# Altium PCB PMS.PcbDoc (part 3 of 3)
Units mm, origin at the board's own origin, x right, y up, seen from the top; angles counter-clockwise.
Board outline 23.9 x 83.5 mm, 4 copper layers (Top Layer, Mid Layer 1, Mid Layer 2, Bottom Layer), stack 0.77 mm thick; 91 components, 62 nets, 411 pads, 218 vias.
Unrouted connection lines stored in the file: 98.
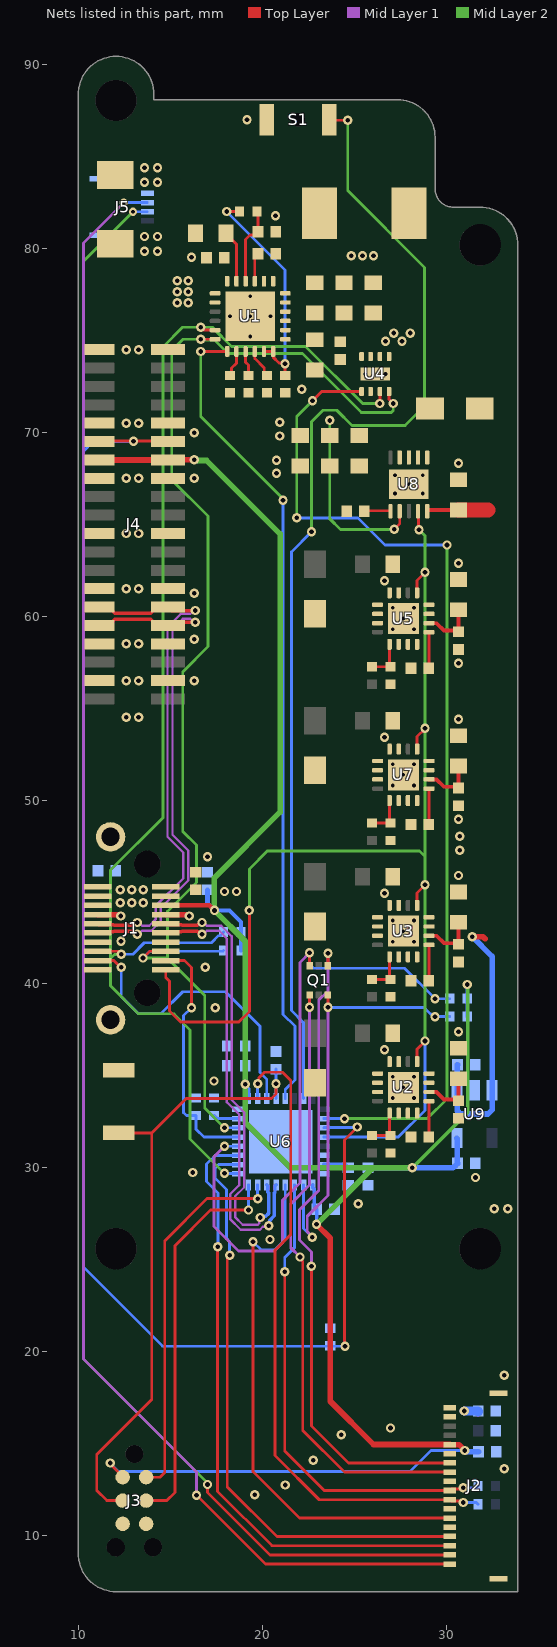
[diagram p4: the nets of this part, all layers, seen from the top]

## Via types
v1: diameter 0.508, hole 0.254, Top Layer to Bottom Layer, tented both sides, 184 vias
v2: diameter 0.381, hole 0.2, Top Layer to Bottom Layer, tented both sides, 32 vias
v3: diameter 0.45, hole 0.2, Top Layer to Bottom Layer, tented both sides, 2 vias

## Nets (pads, with @x,y where several pads share a name; then routed paths per layer and width w, separated by ;. In a path a pad name is that pad's centre, name@x,y a point inside that pad or via, vN(x,y) a via of type N, cw(c..) or ccw(c..) an arc to the next point about the centre after c; other vN are vias at no path point) (continued)
3V3_AO: C2.2 C5.2 C22.2 C23.2 C24.2 C25.2 C26.2 C43.2 J1.5 J2.14 J3.1 J4.14 R15.2 R16.2 R17.2 R18.2 U6.1 U6.15 U6.17 U9.5 | length 134.6
  Top Layer w0.152: v1(11.725,13.95) 11.725,13.905 12.413,13.217 J3.1@12.413,13.173
  Top Layer w0.254: J1.5@14.75,44.275 17.124,44.275 v1(17.4,44)
  Top Layer w0.305: J4.14@11.15,68.5 J4.14@14.875,68.5 14.88,68.505 16.297,68.505 v1(16.302,68.51) ; v1(22.95,26.925) 23.7,26.175 23.7,23.75 23.698,23.748 23.698,17.302 26.05,14.95 J2.14@30.2,14.95 30.202,14.948 30.692,14.948 v1(31.015,14.625)
  Mid Layer 2 w0.203: v1(28.168,30.005) 31.175,33.013 31.175,39.95 v1(31.15,39.975)
  Mid Layer 2 w0.305: v1(16.302,68.51) 16.341,68.471 16.979,68.471 20.975,64.475 20.975,49.35 17.4,45.775 v1(17.4,44) 19.075,42.325 v1(19.075,34.55) 19.075,32.46 21.53,30.005 26.03,30.005 ; v1(22.95,26.925) 26.03,30.005 ; v1(28.168,30.005) 26.03,30.005
  Bottom Layer w0.152: v1(11.725,13.95) 12.191,13.484 28.034,13.484 29.175,14.625 v1(31.015,14.625)
  Bottom Layer w0.203: v1(17.4,44) 18.225,44 18.85,43.375 R16.2@18.85,42.825 R15.2@18.85,41.825 ; C22.2@19.07,36.625 C23.2@19.07,35.55 19.073,35.547 19.073,34.552 v1(19.075,34.55) 19.075,34.468 19.25,34.293 U6.1@19.25,33.775 ; U6.17@22.75,29.075 22.75,28.925 22.835,28.84 22.835,27.885 C24.2@22.97,27.75 22.96,27.74 22.96,26.935 v1(22.95,26.925) ; U6.15@23.35,30.175 24.505,30.175 C26.2@24.675,30.005 C25.2@25.75,30.005 ; R18.2@31.15,38.225 R17.2@31.15,39.2 v1(31.15,39.975)
  Bottom Layer w0.254: C2.2@17.025,45.12 17.025,44.376 v1(17.4,44)
  Bottom Layer w0.305: C25.2@25.75,30.005 v1(28.168,30.005) 30.375,30.005 30.462,30.092 30.482,30.092 30.62,30.23 C43.2@30.62,30.25 30.612,30.258 30.612,31.578 U9.5@30.585,31.605 ; v1(31.015,14.625) 31.09,14.55 C5.2@31.76,14.55
5V0: C1.2 C3.2 C38.2 C39.2 C40.2 J1.1 J1.3 J2.17 J2.18 U8.3 U8.4 U8.7 | length 11
  Top Layer w0.152: v1(27.175,64.725) 27.475,65.025 U8.7@27.475,65.712
  Mid Layer 2 w0.152: v1(23.675,70.65) 23.675,65.3 24.25,64.725 v1(27.175,64.725)
  Bottom Layer w0.508: v1(30.99,16.775) 31.735,16.775 31.76,16.75 C3.2@31.735,16.725
  other v1: 32.625,27.775 33.35,27.775 17.95,45.025 18.6,45.025 30.75,47.275 30.75,48.025 20.95,69.8 20.95,70.55
BOOT0: R14.2 U6.31 | length 1.3
  Bottom Layer w0.152: R14.2@17.375,32.85 17.4,32.85 17.575,32.675 U6.31@18.65,32.675
BQ_BTST: C14.1 U1.21 | length 1.6
  Top Layer w0.152: U1.21@19.596,78.225 19.596,79.542 C14.1@19.767,79.712
BQ_INT: U1.7 U6.5 | length 44.4
  Top Layer w0.152: v1(16.651,74.4) U1.7@18.096,74.4
  Mid Layer 2 w0.152: v1(16.651,74.4) 16.651,70.875 21.133,66.392 v1(21.133,66.317)
  Bottom Layer w0.152: v1(21.133,66.317) 21.133,38.349 21.775,37.707 21.775,34.775 21.25,34.25 U6.5@21.25,33.775
BQ_PMID: C16.1 U1.23 | length 2.8
  Top Layer w0.152: C16.1@18.025,80.8 18.596,80.229 U1.23@18.596,78.225
BQ_REGN: C17.1 R1.2 U1.22 | length 4.2
  Top Layer w0.152: U1.22@19.096,78.225 19.096,80.496 19.337,80.737 19.592,80.737 C17.1@19.767,80.912 19.767,81.967 R1.2@19.721,82.012
BQ_SW: C14.2 L1.1 U1.19 U1.20
BQ_TS: R1.1 R2.1 U1.11 U1.12 | length 12.6
  Top Layer w0.152: v1(18.062,82.012) R1.1@18.771,82.012 ; U1.11@20.096,74.4 U1.12@20.596,74.4 20.596,74.087 20.908,73.775 21.198,73.775 v1(21.242,73.731) 21.245,73.728 R2.1@21.245,73.088 ; R2.1@21.22,73.088 R2.1@21.222,73.087
  Bottom Layer w0.152: v1(18.062,82.012) 21.242,78.832 v1(21.242,73.731)
CABLE_DET: J1.18 U6.3 | length 16.3
  Top Layer w0.152: J1.18@11.05,41.275 11.927,41.275 12.298,40.904 v1(12.335,40.904)
  Bottom Layer w0.152: v1(12.335,40.904) 12.335,39.326 13.286,38.375 14.475,38.375 15.675,39.575 18,39.575 19.875,37.7 19.875,35.188 20.25,34.813 U6.3@20.25,33.775
DEBUG_N: J1.17 R13.2 U6.29 | length 13.5
  Top Layer w0.152: J1.17@14.75,41.275 15.775,41.275 16.15,40.9 v1(16.15,38.7)
  Bottom Layer w0.152: v1(16.15,38.7) 15.725,38.275 15.725,33 15.875,32.85 R13.2@16.4,32.85 16.4,32.1 16.825,31.675 U6.29@18.65,31.675
FB_1V0: R12.1 R21.2 U7.5 | length 2.2
  Top Layer w0.152: R12.1@25.975,48.75 R21.2@26.975,48.75 26.925,48.8 U7.5@26.925,49.975
FB_1V8: R8.1 R9.2 U3.5 | length 2.2
  Top Layer w0.152: R8.1@25.975,40.25 R9.2@26.975,40.25 26.925,40.3 U3.5@26.925,41.475
FB_1V15: R10.1 R11.2 U5.5 | length 2.2
  Top Layer w0.152: R10.1@25.975,57.25 R11.2@26.975,57.25 26.925,57.3 U5.5@26.925,58.475
FB_3V3: R3.1 R4.2 U2.5 | length 2.2
  Top Layer w0.152: R3.1@25.975,31.75 R4.2@26.975,31.75 26.925,31.8 U2.5@26.925,32.975
GND: B-.1 C1.1 C2.1 C3.1 C4.1 C5.1 C6.1 C7.1 C8.1 C9.1 C10.1 C11.1 C12.1 C13.1 C15.1 C16.2 C17.2 C18.1 C19.1 C20.1 C21.1 C22.1 C23.1 C24.1 C25.1 C26.1 C27.1 C28.1 C29.1 C30.1 C31.1 C32.1 C33.1 C34.1 C35.1 C36.1 C37.1 C38.1 C39.1 C40.1 C41.1 C42.1 C43.1 C44.1 J1.7 J1.8 J1.13 J1.14 J1.SHIELD J2.5 J2.7 J2.10 J2.13 J2.SHIELD J3.5 J4.2 J4.4 J4.7 J4.10 J4.13 J4.16 J4.20 J5.4 J5.SHIELD R2.2 R4.1 R5.1 R6.1 R7.1 R9.1 R11.1 R13.1 R14.1 R21.1 R22.2 S1.1 S2.2 U1.2 U1.17 U1.18 U1.25 U2.6 U2.7 U2.8 U2.15 U2.16 U2.17 U3.6 U3.7 U3.8 U3.15 U3.16 U3.17 U4.1 U4.4 U4.6 U4.9 U5.6 U5.7 U5.8 U5.15 U5.16 U5.17 U6.14 U6.16 U6.32 U6.33 U7.6 U7.7 U7.8 U7.15 U7.16 U7.17 U8.11 U9.2 | length 2.6
  Top Layer w0.3: J1.8@11.05,43.775 12.222,43.775 v1(12.301,43.696) ; J1.7@14.75,43.775 15.894,43.775 15.969,43.7 v1(16.025,43.7)
  other v1: 19.6,12.225 21.25,12.75 33.165,13.625 22.775,14.1 24.3,15.475 26.975,15.85 33.165,18.725 20.425,26.1 25.225,28.05 31.6,29.475 16.225,29.75 17.375,34.725 26.65,36.425 30.675,37.4 17.45,38.7 16.9,40.9 12.318,42.327 26.65,44.925 30.675,45.9 17.025,46.925 30.675,48.95 26.65,53.425 30.675,54.4 12.6,54.5 13.275,54.5 12.6,56.5 13.275,56.5 16.3,56.5 30.675,57.45 12.6,58.5 13.275,58.5 16.3,58.75 16.3,61.25 12.6,61.5 13.275,61.5 26.65,61.925 30.675,62.875 12.6,64.5 13.275,64.5 12.6,67.5 13.275,67.5 16.3,67.5 20.775,67.775 30.675,68.325 20.775,68.475 16.3,69.975 12.6,70.5 13.275,70.5 22.15,72.35 12.6,74.5 13.275,74.5 16.15,79.525 24.85,79.6 25.45,79.6 26.05,79.6 20.725,81.775 13.6,83.6 14.3,83.6 13.6,84.4 14.3,84.4 19.175,87
  other v2: 27.095,33.795 28.255,33.795 27.675,34.375 27.095,34.955 28.255,34.955 27.095,42.295 28.255,42.295 27.675,42.875 27.095,43.455 28.255,43.455 27.095,50.795 28.255,50.795 27.675,51.375 27.095,51.955 28.255,51.955 27.095,59.295 28.255,59.295 27.675,59.875 27.095,60.455 28.255,60.455 27.225,66.675 28.725,66.675 27.975,67.175 27.225,67.675 28.725,67.675 25.6,73.175 26.7,73.175 19.346,75.212 18.246,76.312 19.346,76.312 20.446,76.312 19.346,77.412
L: J2.2 J5.2 | length 88.9
  Top Layer w0.152: v1(17.025,12.775) 17.025,12.35 20.425,8.95 J2.2@30.2,8.95
  Mid Layer 2 w0.152: v3(12.975,82) 10.28,79.305 10.28,19.595 17.025,12.85 v1(17.025,12.775)
  Bottom Layer w0.152: v3(12.975,82) J5.2@13.75,82
LA: J2.1 J5.3 | length 90.4
  Top Layer w0.152: v1(16.425,12.2) 20.175,8.45 J2.1@30.2,8.45
  Mid Layer 1 w0.152: v3@12.514,82.539 10.28,80.305 10.28,19.595 16.425,13.45 v1(16.425,12.2)
  Bottom Layer w0.152: v3(12.475,82.5) J5.3@13.75,82.5
LED_DATA: J2.6 U6.20 | length 29.4
  Top Layer w0.152: v1(19.5,25.975) 19.5,13.475 22.025,10.95 J2.6@30.2,10.95
  Bottom Layer w0.152: v1(19.5,25.975) 19.95,25.525 20.675,25.525 21.25,26.1 U6.20@21.25,29.075
MAX_INT: U4.5 U6.10 | length 55.7
  Top Layer w0.152: v1(22.734,71.72) 23.239,72.225 U4.5@25.4,72.225
  Mid Layer 2 w0.152: v1(21.875,65.35) 21.875,70.861 v1(22.734,71.72) ; v1(24.475,32.675) 28.975,32.675 30.05,33.75 v1(30.05,63.875)
  Bottom Layer w0.152: v1(21.875,65.35) 25.2,65.35 26.675,63.875 v1(30.05,63.875) ; U6.10@23.35,32.675 v1(24.475,32.675)
MCU_DATA_N: J1.11 U6.21 | length 24.2
  Top Layer w0.189: J1.11@14.75,42.775 14.806,42.831 15.606,42.831 15.643,42.867 16.479,42.867 16.639,42.708 v1(16.725,42.708)
  Mid Layer 1 w0.127: v1(16.725,42.708) 16.808,42.708 16.99,42.889 17.095,42.889 17.661,42.889 18.075,42.475 18.075,33.575 18.75,32.9 18.75,29.059 18.253,28.563 18.253,27.212 18.833,26.633 19.874,26.633 20.033,26.792 20.29,26.792 v1(20.349,26.851)
  Bottom Layer w0.189: v1(20.349,26.851) 20.41,26.912 20.41,27.138 20.658,27.386 20.658,28.632 20.694,28.669 20.694,29.019 U6.21@20.75,29.075
MCU_DATA_P: J1.9 U6.22 | length 23.8
  Top Layer w0.189: J1.9@14.75,43.275 14.806,43.219 15.606,43.219 15.643,43.183 16.479,43.183 16.639,43.343 v1(16.725,43.343)
  Mid Layer 1 w0.127: v1(16.725,43.343) 16.808,43.343 16.99,43.161 17.208,43.161 17.773,43.161 18.347,42.588 18.347,33.688 19.022,33.013 19.022,28.947 18.525,28.45 18.525,27.325 18.945,26.905 19.761,26.905 19.841,26.984 19.841,27.241 v1(19.9,27.3)
  Bottom Layer w0.189: v1(19.9,27.3) 19.961,27.361 20.187,27.361 20.342,27.516 20.342,28.632 20.306,28.669 20.306,29.019 U6.22@20.25,29.075
NetR5_2: R5.2 U1.8 | length 1.4
  Top Layer w0.152: R5.2@18.246,73.112 18.336,73.201 18.336,73.501 18.596,73.762 U1.8@18.596,74.4
NetR6_2: R6.2 U1.9 | length 1.3
  Top Layer w0.152: U1.9@19.096,74.4 19.096,73.812 19.246,73.662 R6.2@19.246,73.112
NetR7_2: R7.2 U1.10 | length 1.6
  Top Layer w0.152: U1.10@19.596,74.4 19.596,74.012 20.107,73.501 20.107,73.251 R7.2@20.247,73.112
PMS_SCL: J1.16 R16.1 U1.5 U4.7 U6.25 | length 74.1
  Top Layer w0.152: J1.16@11.05,41.775 12.172,41.775 v1(12.335,41.612) ; v1(16.656,75.719) 16.813,75.562 U1.5@17.434,75.562 ; v1(26.4,71.57) U4.7@26.4,72.225
  Mid Layer 2 w0.152: v1(12.335,41.612) 12.32,41.597 11.972,41.597 11.75,41.375 ; v1(17.95,29.7) 16.075,31.575 16.075,37.5 15.2,38.375 13.275,38.375 11.75,39.9 11.75,41.375 ; v1(26.4,71.57) 25.467,71.57 22.362,74.675 18.325,74.675 17.281,75.719 v1(16.656,75.719) 15.669,75.719 14.6,74.65 14.6,49.043 11.75,46.193 11.75,41.375
  Bottom Layer w0.152: v1(12.335,41.612) 12.956,41.612 13.582,42.239 17.232,42.239 17.619,42.626 17.726,42.626 17.9,42.8 R16.1@17.9,42.825 ; v1(17.95,29.7) 17.962,29.688 18.637,29.688 U6.25@18.65,29.675
PMS_SDA: J1.15 R15.1 U1.6 U4.8 U6.30 | length 69.8
  Top Layer w0.152: v1(13.515,41.412) 13.878,41.775 J1.15@14.75,41.775 ; v1(16.649,75.062) U1.6@17.434,75.062 ; U4.8@26.9,72.225 26.9,71.8 v1(27.13,71.57)
  Mid Layer 2 w0.152: v1(13.515,41.412) 14.85,41.412 ; v1(17.95,32.175) 16.875,33.25 16.875,39.375 14.85,41.4 14.85,41.412 ; v1(27.13,71.57) 27.128,71.568 27.128,71.195 27.016,71.083 25.39,71.083 22.18,74.293 18.147,74.293 17.435,75.005 16.706,75.005 v1(16.649,75.062) 15.687,75.062 15.075,74.45 15.075,67.425 17.05,65.45 17.05,58.35 15.675,56.975 15.675,48.3 16.425,47.55 16.425,45.525 14.85,43.95 14.85,41.412
  Bottom Layer w0.152: v1(13.515,41.412) 13.878,41.775 17.85,41.775 R15.1@17.9,41.825 ; v1(17.95,32.175) U6.30@18.65,32.175
PWR_BTN_N: S1.2 U6.7 | length 63
  Top Layer w0.152: S1.2@23.65,87 23.675,86.975 v1(24.65,86.975)
  Mid Layer 2 w0.152: v1(22.678,64.594) 22.678,70.578 23.3,71.2 24.05,71.2 24.875,70.375 27.775,70.375 28.825,71.425 28.825,78.975 24.65,83.15 v1(24.65,86.975)
  Bottom Layer w0.152: U6.7@22.25,33.775 22.25,37.89 21.586,38.554 21.586,63.502 v1(22.678,64.594)
PWR_ON: J1.19 U2.13 U3.13 U5.13 U6.12 U7.13 U8.9 | length 69
  Top Layer w0.152: J1.19@14.75,40.775 14.75,40.346 14.95,40.146 14.95,38.525 15.55,37.925 18.725,37.925 19.3,38.5 v1(19.3,44) ; U2.13@28.425,35.775 28.425,36.45 28.85,36.875 v1(28.85,36.9) ; U3.13@28.425,44.275 28.425,44.95 28.85,45.375 v1(28.85,45.4) ; U7.13@28.425,52.775 28.425,53.45 28.85,53.875 v1(28.85,53.9) ; U5.13@28.425,61.275 28.425,61.95 28.85,62.375 v1(28.85,62.4) ; U8.9@28.475,65.712 28.5,65.688 28.5,64.725 v1(28.525,64.7)
  Mid Layer 2 w0.152: v1(19.3,44) 19.3,46.25 20.275,47.225 28.55,47.225 28.85,46.925 ; v1(28.525,64.7) 28.85,64.375 v1(28.85,62.4) v1(28.85,53.9) 28.85,46.925 ; v1(28.85,36.9) v1(28.85,45.4) 28.85,46.925
  Bottom Layer w0.152: U6.12@23.35,31.675 27.4,31.675 28.85,33.125 v1(28.85,36.9)
RESET_N: C36.2 J3.3 S2.1 U6.4 | length 33.9
  Top Layer w0.152: S2.1@12.2,31.9 13.99,31.9 ; J3.3@12.413,11.903 11.547,11.903 11,12.45 11,14.4 13.99,17.39 13.99,31.9 ; v1(20.75,34.575) 20.75,34.025 20.5,33.775 15.865,33.775 13.99,31.9
  Bottom Layer w0.152: U6.4@20.75,33.775 v1(20.75,34.575) C36.2@20.75,35.37
SS_1V0: C35.2 U7.9 | length 2
  Top Layer w0.152: C35.2@29.055,48.675 29.075,48.695 U7.9@29.075,50.625
SS_1V8: C21.2 U3.9 | length 2
  Top Layer w0.152: C21.2@29.055,40.175 29.075,40.195 U3.9@29.075,42.125
SS_1V15: C31.2 U5.9 | length 2
  Top Layer w0.152: C31.2@29.055,57.175 29.075,57.195 U5.9@29.075,59.125
SS_3V3: C13.2 U2.9 | length 2
  Top Layer w0.152: C13.2@29.055,31.675 29.075,31.695 U2.9@29.075,33.625
SS_5V0: C41.2 U8.6 | length 1.4
  Top Layer w0.152: C41.2@25.555,65.7 25.592,65.737 U8.6@26.975,65.737
STUSB_INT: J1.20
SW_1V0: L5.1 U7.1 U7.2 U7.3
SW_1V8: L3.1 U3.1 U3.2 U3.3
SW_1V15: L4.1 U5.1 U5.2 U5.3
SW_3V3: L2.1 U2.1 U2.2 U2.3
SW_5V0: L6.2 U8.1 U8.2
SWCLK: J3.4 U6.24 | length 21.3
  Top Layer w0.152: J3.4@13.683,11.903 14.81,11.903 15.25,12.343 15.25,25.759 17.196,27.705 v1(19.25,27.705)
  Bottom Layer w0.152: v1(19.25,27.705) U6.24@19.25,29.075
SWDIO: J3.2 U6.23 | length 20.5
  Top Layer w0.152: J3.2@13.683,13.173 14.448,13.173 14.7,13.425 14.7,26.025 17,28.325 v1(19.75,28.325)
  Bottom Layer w0.152: v1(19.75,28.325) U6.23@19.75,29.075
SWO: J3.6
SYS_SCL: J2.9 R20.1 U6.19 | length 26.2
  Top Layer w0.152: v1(21.225,24.348) 21.225,14.6 23.375,12.45 J2.9@30.2,12.45 30.274,12.524 30.768,12.524 30.844,12.6 v1(30.94,12.6)
  Bottom Layer w0.152: v1(21.225,24.348) 21.225,25.125 21.75,25.65 U6.19@21.75,29.075 ; v1(30.94,12.6) 31.64,12.6 R20.1@31.74,12.7
SYS_SDA: J2.8 R19.1 U6.2 | length 36.1
  Top Layer w0.152: v1(19.75,34.575) 19.814,34.639 19.814,34.889 20.125,35.2 21.1,35.2 21.55,34.75 21.55,26.369 20.7,25.519 20.7,14.35 23.1,11.95 J2.8@30.2,11.95 30.274,11.876 30.768,11.876 30.844,11.8 v1(30.94,11.8)
  Bottom Layer w0.152: U6.2@19.75,33.775 v1(19.75,34.575) ; v1(30.94,11.8) 31.64,11.8 R19.1@31.74,11.7
TEMP: J4.15 R22.1 U6.11 | length 81.1
  Top Layer w0.152: J4.15@11.15,69.5 11.175,69.525 v1(13,69.525) 14.85,69.525 J4.15@14.875,69.5 ; v1(24.5,20.3) 24.475,20.325 24.475,31.518 v1(25.175,32.218)
  Bottom Layer w0.152: v1(13,69.525) 12.975,69.5 10.8,69.5 10.276,68.976 10.276,24.6 14.576,20.3 23.7,20.3 v1(24.5,20.3) ; U6.11@23.35,32.175 23.371,32.196 25.154,32.196 v1(25.175,32.218)
VBAT: B+.1 C15.2 C27.2 U1.13 U1.14 U4.2 U4.3
  other v1: 26.7,74.95 27.6,74.95 27.15,75.4 28.05,75.4 13.6,79.85 14.3,79.85 13.6,80.65 14.3,80.65
VCHRG: C6.2 C44.2 J1.2 J1.4 J1.6 U1.1 U1.24
  other v1: 12.275,44.425 12.9,44.425 13.525,44.425 12.275,45.125 12.9,45.125 13.525,45.125 15.375,77.05 15.975,77.05 15.375,77.65 15.975,77.65 15.375,78.25 15.975,78.25
VOL_DOWN_N: J2.4 U6.26 | length 32.2
  Top Layer w0.152: v1(18.225,25.25) 18.225,25.154 18.1,25.029 18.1,12.65 20.8,9.95 J2.4@30.2,9.95
  Bottom Layer w0.152: v1(18.225,25.25) 18.225,26 18.05,26.175 18.05,28.821 17.45,29.421 17.45,30 17.625,30.175 U6.26@18.65,30.175
VOL_UP_N: J2.3 U6.27 | length 33.8
  Top Layer w0.152: v1(17.575,25.7) 17.575,12.4 20.525,9.45 J2.3@30.2,9.45
  Bottom Layer w0.152: v1(17.575,25.7) 17.6,25.725 17.6,28.625 16.975,29.25 16.975,30.2 17.45,30.675 U6.27@18.65,30.675
VSYS: C7.2 C8.2 C9.2 C10.2 C11.2 C18.2 C19.2 C28.2 C29.2 C32.2 C33.2 C37.2 C42.2 L1.2 L6.1 U1.15 U1.16 U2.10 U2.11 U2.12 U3.10 U3.11 U3.12 U5.10 U5.11 U5.12 U7.10 U7.11 U7.12 U8.10 U9.1 U9.3 | length 30.5
  Top Layer w0.203: U8.10@28.975,65.712 28.975,65.762 28.988,65.775 C37.2@30.675,65.775 ; U3.10@29.075,42.625 29.08,42.62 29.48,42.62 29.879,42.221 30.609,42.221 C19.2@30.675,42.155 C18.2@30.675,43.35 ; U7.10@29.075,51.125 29.08,51.12 29.48,51.12 29.879,50.721 30.609,50.721 C33.2@30.675,50.655 C32.2@30.675,51.85 ; U5.10@29.075,59.625 29.08,59.62 29.48,59.62 29.879,59.221 30.609,59.221 C29.2@30.675,59.155 C28.2@30.675,60.35 ; U2.10@29.08,34.12 29.48,34.12 29.879,33.721 30.609,33.721 C11.2@30.675,33.655 C10.2@30.675,34.85
  Top Layer w0.305: v1(31.425,42.575) 32,42.575 32.125,42.45
  Top Layer w0.8: C37.2@30.675,65.775 32.275,65.775
  Bottom Layer w0.305: C42.2@30.62,35.6 30.612,35.593 30.612,34.232 U9.1@30.605,34.225 30.605,33.104 30.784,32.925 32.275,32.925 32.505,33.155 U9.3@32.505,34.225 32.505,41.495 v1(31.425,42.575)
WII_DATA_N: J1.12 J4.5 | length 27.8
  Top Layer w0.189: J1.12@11.05,42.775 11.106,42.831 11.906,42.831 11.943,42.867 12.954,42.867 13.114,42.708 v1(13.2,42.708) ; J4.5@11.15,59.5 11.675,59.5 11.881,59.706 11.881,59.731 11.991,59.842 13.934,59.842 14.044,59.731 14.044,59.706 14.25,59.5 J4.5@14.875,59.5 15.05,59.675 v1(16.35,59.675)
  Mid Layer 1 w0.127: v1(13.2,42.708) 13.283,42.708 13.465,42.889 13.57,42.889 13.963,42.889 14.472,43.398 14.472,44.122 15.98,45.63 15.98,47.255 15.117,48.117 15.117,59.292 15.682,59.857 16.085,59.857 16.267,59.675 v1(16.35,59.675)
WII_DATA_P: J1.10 J4.6 | length 27.8
  Top Layer w0.189: J1.10@11.05,43.275 11.106,43.219 11.906,43.219 11.943,43.183 12.954,43.183 13.114,43.343 v1(13.2,43.343) ; J4.6@11.15,60.5 11.675,60.5 11.881,60.294 11.881,60.269 11.991,60.158 13.934,60.158 14.044,60.269 14.044,60.294 14.25,60.5 J4.6@14.875,60.5 15.065,60.31 v1(16.35,60.31)
  Mid Layer 1 w0.127: v1(13.2,43.343) 13.283,43.343 13.465,43.161 13.683,43.161 13.85,43.161 14.2,43.511 14.2,44.234 15.708,45.742 15.708,47.142 14.845,48.005 14.845,59.405 15.569,60.128 16.085,60.128 16.267,60.31 v1(16.35,60.31)
WII_SCL: Q1.6 R18.1 U6.18 | length 23.6
  Top Layer w0.152: v1(23.575,38.725) Q1.6@23.575,39.4
  Mid Layer 1 w0.152: v1(22.725,26.225) 22.725,26.26 22.449,26.536 22.449,27.364 23.575,28.49 v1(23.575,38.725)
  Bottom Layer w0.152: U6.18@22.25,29.075 22.25,26.7 v1(22.725,26.225) ; v1(23.575,38.725) 28.8,38.725 29.161,38.364 29.165,38.364 29.304,38.225 R18.1@30.2,38.225
  other v1: 29.4,38.225
WII_SCL_1V8: J2.12 Q1.1 | length 35.7
  Top Layer w0.152: v1(22.675,24.65) 22.687,24.638 22.687,15.963 24.7,13.95 J2.12@30.2,13.95 ; Q1.1@23.575,41 v1(23.575,41.675)
  Mid Layer 1 w0.152: v1(22.675,24.65) 22.675,25.425 22.025,26.075 22.025,27.723 23.075,28.773 23.075,39.125 23.575,39.625 v1(23.575,41.675)
WII_SDA: Q1.3 R17.1 U6.28 | length 35.9
  Top Layer w0.152: Q1.3@22.575,41 v1(22.575,41.7)
  Mid Layer 1 w0.152: v1(17.95,31.175) 17.375,30.6 17.375,26.808 18.708,25.475 20.668,25.475 21.1,25.907 21.1,28.234 22.05,29.184 22.05,41.175 v1(22.575,41.7)
  Bottom Layer w0.152: v1(17.95,31.175) U6.28@18.65,31.175 ; v1(22.575,41.7) 22.575,41.1 22.825,40.85 27.75,40.85 v1(29.4,39.2) R17.1@30.2,39.2
WII_SDA_1V8: J2.11 Q1.4 | length 33.3
  Top Layer w0.152: v1(22.05,25.15) 22.05,25.054 22.2,24.904 22.2,15.725 24.475,13.45 J2.11@30.2,13.45 ; v1(22.575,38.725) Q1.4@22.575,39.4
  Mid Layer 1 w0.152: v1(22.05,25.15) 21.55,25.65 21.55,28.036 22.575,29.061 v1(22.575,38.725)
pads on no net: J1. J3. J5.1 S1. U1.3 U1.4 U2.4 U3.4 U5.4 U6.6 U6.8 U6.9 U6.13 U7.4 U8.5 U8.8 U9.4

## Polygon pours and split planes (outlines as drawn)
GND on Top Layer "GND_L-01_P-001" (solid, remove dead copper, pour order 927): 10,6.95 33.9,6.95 33.9,90.5 10,90.5
3V3 on Top Layer "3V3_L01_P908" (solid, pour order 908): 22.275,36.575 22.275,38.075 23.475,38.075 23.75,37.8 25.85,37.8 25.85,36.85 23.75,36.85 23.475,36.575
1V8 on Top Layer "1V8_L-01_P-023" (solid, pour order 901): 16.025,54.575 16.625,54.575 16.625,55.8 14.875,55.8 14.875,55.2 16.025,55.2
VSYS on Top Layer "VSYS_L01_P902" (solid, pour order 902): 31.85,43.75 28.775,43.75 28.775,42.95 31.85,42.95
VSYS on Top Layer "VSYS_L01_P903" (solid, pour order 903): 31.85,52.25 28.775,52.25 28.775,51.45 31.85,51.45
VSYS on Top Layer "VSYS_L01_P904" (solid, pour order 904): 31.85,35.25 28.775,35.25 28.775,34.45 31.85,34.45
VSYS on Top Layer "VSYS_L01_P905" (solid, pour order 905): 31.85,60.75 28.775,60.75 28.775,59.95 31.85,59.95
5V0 on Top Layer "5V0_L-01_P-003" (solid, pour order 906): 14,45.425 14,44.625 18.9,44.625 18.9,45.425
SW_5V0 on Top Layer "SW_5V0_L01_P907" (solid, pour order 907): 28.36,68.25 29.09,68.25 29.09,69.715 29.875,70.5 29.875,71.9 28.36,71.9
VCHRG on Top Layer "VCHRG_L-01_P-001" (solid, pour order 909): 10.3,44.125 13.821,44.127 13.821,45.425 10.3,45.425
VCHRG on Top Layer "VCHRG_L01_P910" (solid, pour order 910): 18.217,78.515 18.217,79.81 17.64,79.81 17.64,78.515 16.949,78.515 15.1,78.514 15.1,76.775 16.25,76.775 16.25,77.442 17.724,77.442 17.724,77.935 18.217,77.935
VBAT on Top Layer "VBAT_L-01_P-001" (solid, pour order 911): 10.998,81 14.623,81 14.623,79.5 10.998,79.5
SW_1V15 on Top Layer "SW_1V15_L01_P912" (solid, pour order 912): 26.575,59.475 25.875,59.475 25.775,59.375 22.275,59.375 22.275,60.875 25.775,60.875 25.875,60.775 26.575,60.775
SW_3V3 on Top Layer "SW_3V3_L01_P913" (solid, pour order 913): 26.575,33.975 25.875,33.975 25.775,33.875 22.275,33.875 22.275,35.375 25.775,35.375 25.875,35.275 26.575,35.275
SW_1V8 on Top Layer "SW_1V8_L01_P914" (solid, pour order 914): 26.575,42.475 25.875,42.475 25.775,42.375 22.275,42.375 22.275,43.875 25.775,43.875 25.875,43.775 26.575,43.775
SW_1V0 on Top Layer "SW_1V0_L01_P915" (solid, pour order 915): 26.575,50.975 25.875,50.975 25.775,50.875 22.275,50.875 22.275,52.375 25.775,52.375 25.875,52.275 26.575,52.275
3V3 on Top Layer "3V3_L-01_P-013" (solid, pour order 916): 23.475,36.575 15.35,36.575 14.3,36.575 14.3,37.375 23.475,37.375
VBAT on Top Layer "VBAT_L01_P917" (solid, pour order 917): 26.525,74.637 26.525,73.875 25.775,73.875 25.776,74.637 22.371,74.637 22.066,74.942 20.969,74.942 20.969,75.682 28.343,75.682 28.343,74.637
3V3 on Top Layer "3V3_L-01_P-011" (solid, pour order 918): 28.55,23.325 29.35,23.325 29.35,16.1 31.275,16.1 31.275,15.3 28.55,15.3
1V8 on Top Layer "1V8_L01_P919" (solid, pour order 919): 22.7,46.575 20.25,49.025 20.25,53.475 19.65,53.475 19.65,48.775 22.275,46.15 22.275,45.075 23.475,45.075 23.75,45.35 25.85,45.35 25.85,46.3 23.75,46.3 23.475,46.575
BQ_SW on Top Layer "BQ_SW_L01_P920" (solid, pour order 920): 22.169,83.307 22.168,81.093 21.097,80.022 20.437,80.022 20.436,79.304 19.975,78.842 19.977,77.935 20.681,77.934 21.922,79.175 24.074,79.175 24.074,83.307
5V0 on Top Layer "5V0_L01_P921" (solid, pour order 921): 20.975,70.925 20.65,70.925 20.65,69.425 27.36,69.425 27.36,68.25 28.09,68.25 28.09,70.925
5V0 on Top Layer "5V0_L-01_P-010" (solid, pour order 922): 29.6,17.875 29.6,16.3 31.275,16.3 31.275,17.1 30.4,17.1 30.4,22.7 30.4,26.55 31.225,27.375 33.7,27.375 33.7,28.175 30.875,28.175 29.6,26.9
VSYS on Top Layer "VSYS_L01_P900" (solid, pour order 900): 27.019,76.887 27.02,83.307 28.925,83.307 28.925,75.942 22.227,75.942 20.969,75.942 20.969,76.682 21.907,76.682 22.112,76.887
VSYS on Top Layer "VSYS_L-01_P-001" (solid, pour order 923): 31.075,73.362 31.075,70.675 33.698,70.675 33.702,74.523 28.925,79.3 28.35,79.3 28.35,76.087
1V15 on Top Layer "1V15_L01_P924" (solid, pour order 924): 20.55,63.575 20.1,64.025 20.1,69.125 15.925,73.3 15.925,73.8 10.325,73.8 10.325,71.2 15.925,71.2 18.6,68.525 18.6,63.375 19.9,62.075 23.475,62.075 23.75,62.35 25.85,62.35 25.85,63.3 23.75,63.3 23.475,63.575
1V0 on Top Layer "1V0_L01_P925" (solid, pour order 925): 22.275,55.075 20.2,57.15 20.2,60.5 17.8,62.9 17.8,66.8 10.325,66.8 10.325,65.2 16.3,65.2 16.3,63.8 10.324,63.8 10.323,62.2 16.35,62.2 18.7,59.85 18.7,56.498 21.65,53.575 22.275,53.575 23.475,53.575 23.75,53.85 25.85,53.85 25.85,54.8 23.75,54.8 23.475,55.075
VSYS on Top Layer "VSYS_L-01_P-101" (solid, pour order 926): 31.075,70.675 31.7,70.05 31.7,34.45 33.725,34.45 33.725,71.925 31.075,71.925
GND on Bottom Layer "GND_L-04_P-003" (solid, remove dead copper, pour order 937): 10,6.95 33.9,6.95 33.9,90.5 10,90.5
5V0 on Bottom Layer "5V0_L-02_P-002" (solid, pour order 935): 30.475,47 30.475,48.3 32.25,48.3 32.25,68.075 30.9,69.425 23.425,69.425 20.65,69.425 20.65,70.925 24.178,70.925 31.425,70.925 33.7,68.65 33.7,47
VCHRG on Bottom Layer "VCHRG-L-04_P-002" (solid, pour order 936): 14.975,46.46 14.975,46.925 14.325,47.575 14.325,77.75 15.089,78.514 16.25,78.514 16.25,76.775 15.725,76.25 15.725,48.1 16.375,47.45 16.375,45.4 15.1,44.125 11.74,44.125 11.74,46.46 12.32,46.46 12.32,45.43 14.425,45.425 14.975,45.975
VBAT on Bottom Layer "VBAT_L-04_P-001" (solid, pour order 933): 16.975,82.55 16.25,81.825 16.25,80.75 15,79.5 13.325,79.5 13.325,81 14.375,81 14.775,81.4 14.775,82.425 16.375,84.025 25.65,84.025 28.35,81.325 28.35,75.675 28.343,74.637 26.4,74.637 26.4,75.65 26.85,76.1 26.85,80.75 25.05,82.55
5V0 on Bottom Layer "5V0_L-04_P-004" (solid, pour order 934): 18.9,44.625 18.903,68.853 19.475,69.425 21.275,69.425 21.275,70.925 19.075,70.925 17.65,69.5 17.65,44.625
GND on Mid Layer 2 "GND_L-03_P-001" (solid, remove dead copper, pour order 932): 10,6.95 33.9,6.95 33.9,90.5 10,90.5
5V0 on Mid Layer 2 "5V0_L-03_P-004" (solid, pour order 931): 30.475,48.3 30.475,47 32.25,47 32.25,27.375 33.7,27.375 33.7,48.3
3V3 on Mid Layer 2 "3V3_L-02_P-005" (solid, pour order 930): 14.3,37.375 14.3,25.8 17.925,22.175 29.224,22.175 29.226,23.325 18.4,23.325 15.45,26.275 15.45,37.375
1V8 on Mid Layer 2 "1V8_L-02_P-001" (solid, pour order 929): 20.25,52.275 19.025,52.275 16.725,54.575 16.025,54.575 16.025,55.775 17.225,55.775 19.525,53.475 20.25,53.475
GND on Mid Layer 1 "GND_L-002_P-001" (solid, remove dead copper, pour order 928): 10,6.95 33.9,6.95 33.9,90.5 10,90.5

## Keep-outs
Top Layer:
  region: 14.925,13.525 14.925,13.575 15.025,13.575 15.025,13.525
Bottom Layer:
  region: 20.935,27.435 20.935,27.385 21.01,27.385 21.01,27.435
  region: 21.962,26.9 21.962,26.85 22.037,26.85 22.037,26.9
  region: 21.46,26.285 21.46,26.235 21.535,26.235 21.535,26.285

## Silkscreen, mask and mechanical layers (free items; w line width, h text height)
Top Overlay:
  text "Wii PMS / Rev 1" at 19.22,8.95 h0.76
Mechanical 1:
  the board outline again, w0.1